# Altium PCB control plate.pcbdoc
Units mm, origin at the board's own origin, x right, y up, seen from the top; angles counter-clockwise.
Board outline 400 x 240 mm, 2 copper layers (Top Layer, Bottom Layer); 17 components, 0 nets, 0 pads, 0 vias.
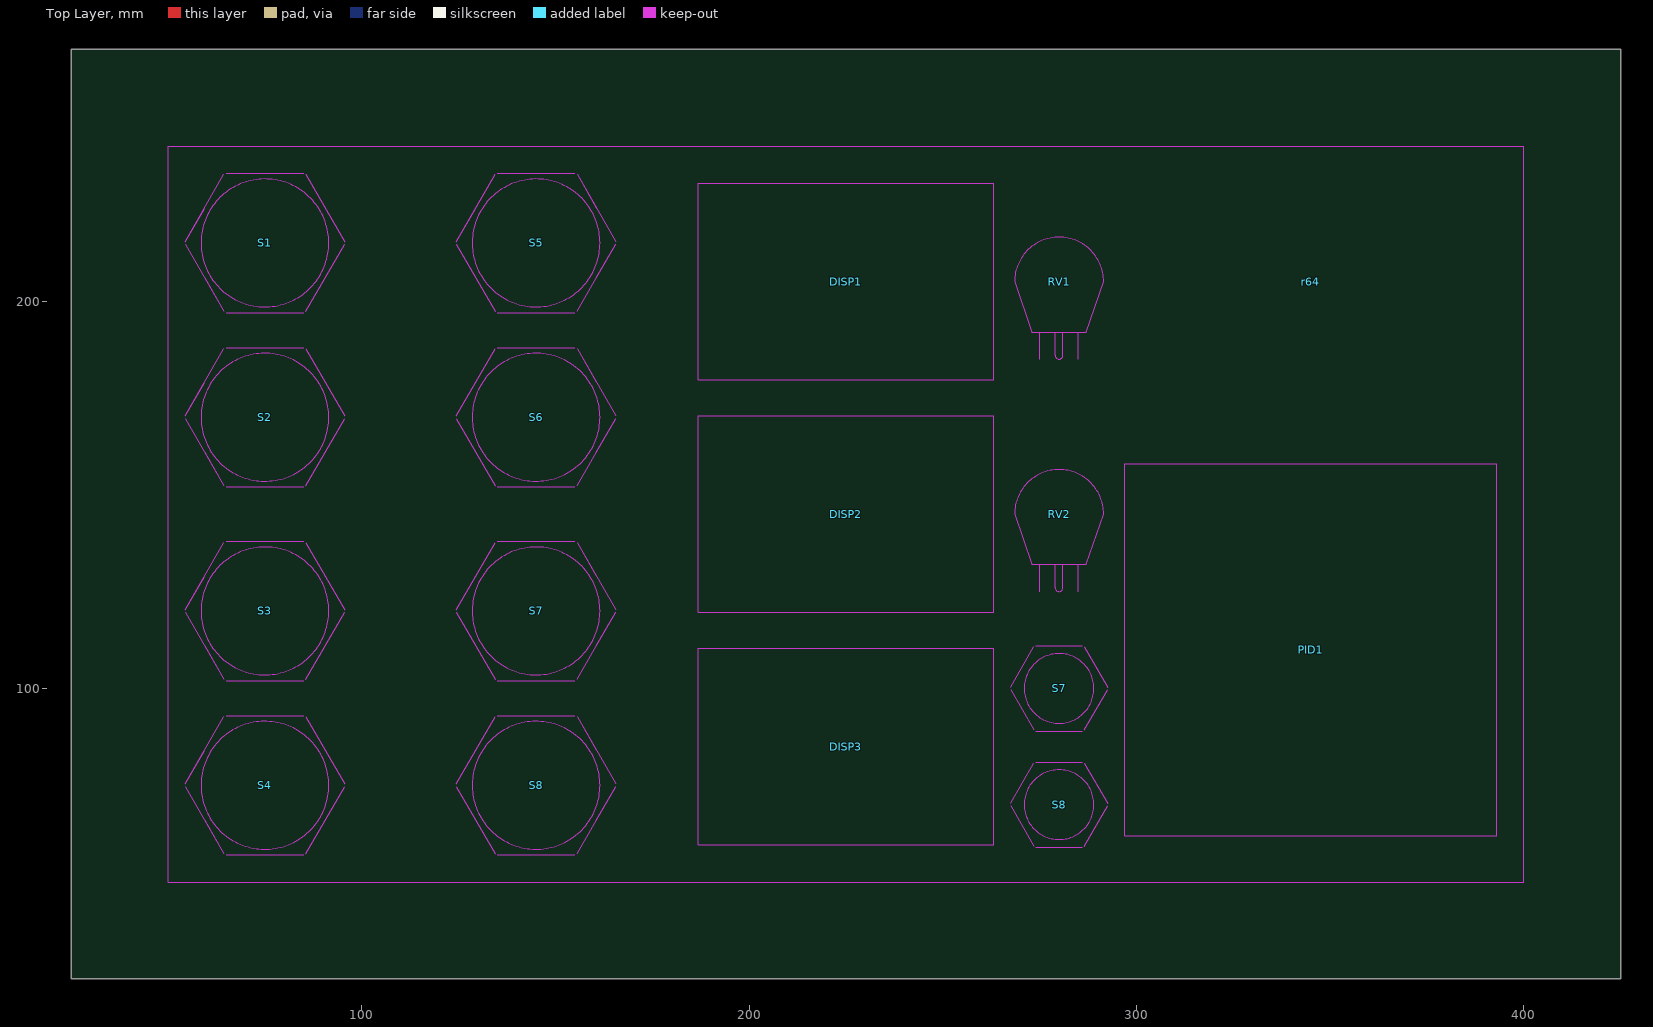
[diagram p0: Top Layer view]
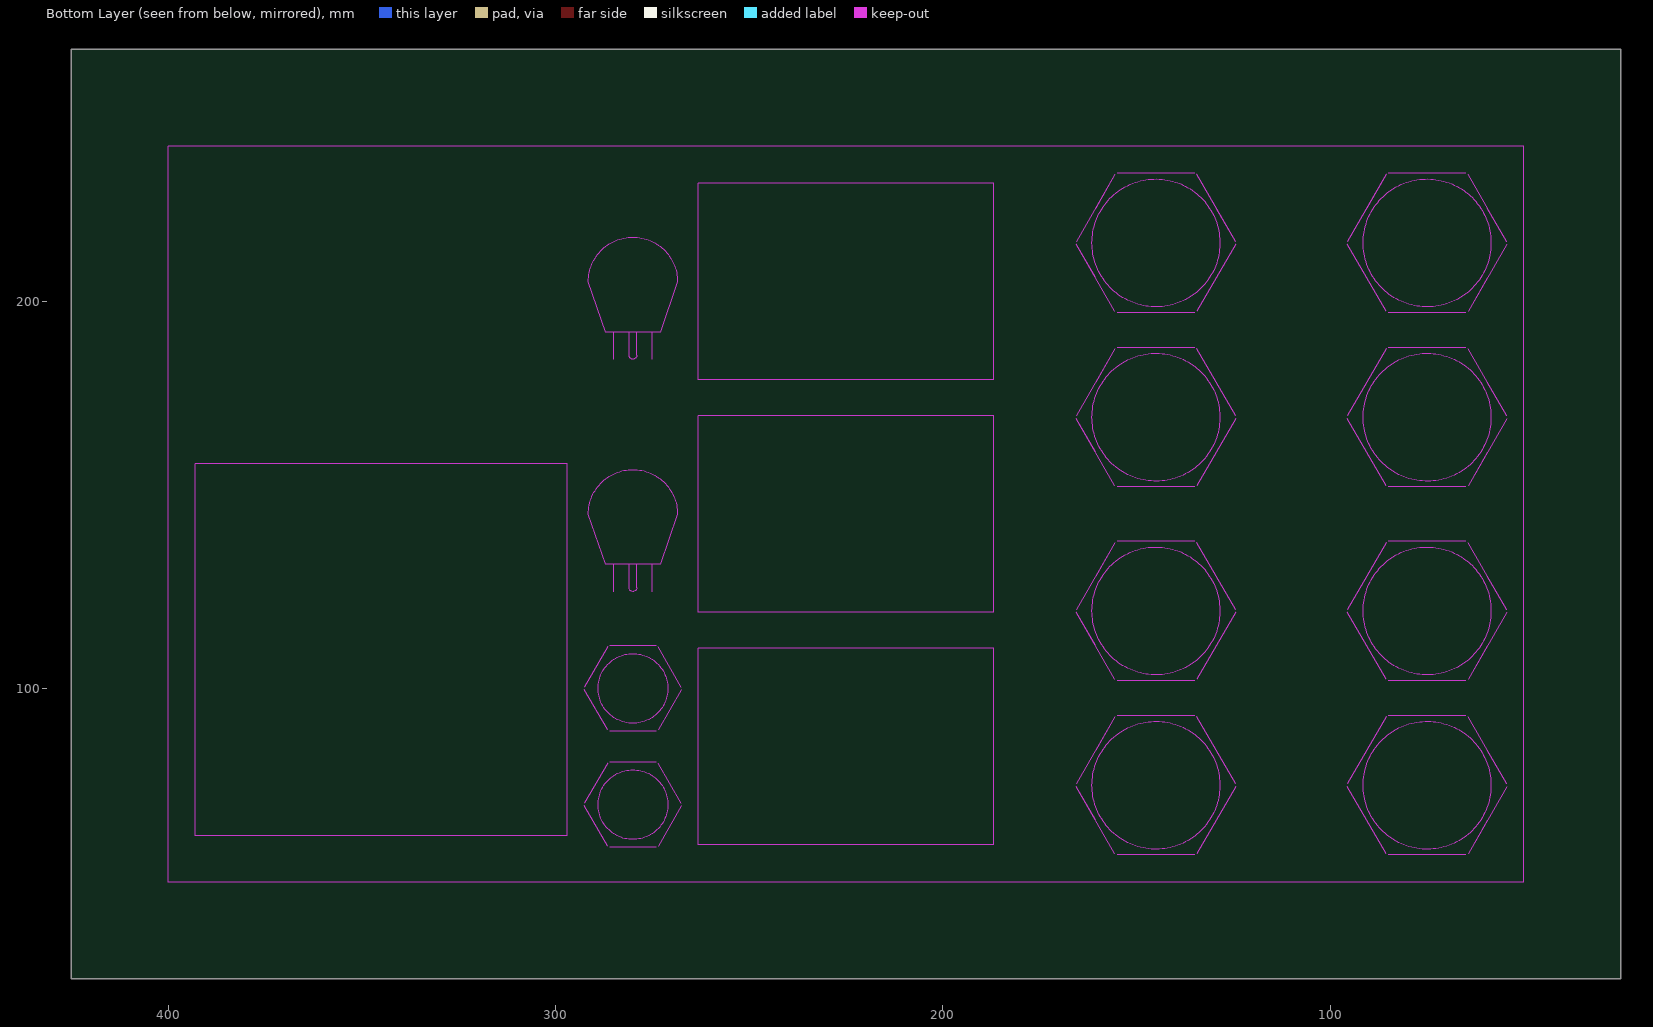
[diagram p1: Bottom Layer view, seen from below]

## Layer stack, top to bottom
Top Layer: signal copper 0.0356
Dielectric: dielectric 0.32, FR-4, Dk 4.8
Bottom Layer: signal copper 0.0356

## Board outline
25,25 25,265 425,265 425,25

## Design rules (kind name [scope] priority, off if disabled: settings)
Clearance [All] p1: gap=0.254
PolygonConnect [All] p1: connectstyle=Relief reliefconductorwidth=0.254 reliefentries=4 polygonreliefangle="90 Angle"
RoutingVias [All] p1: holewidth=0.711 width=1.27 viastyle="Through Hole" minholewidth=0.711 minwidth=1.27 maxholewidth=0.711 maxwidth=1.27
SilkscreenOverComponentPads [All] p1: minsilkscreentomaskgap=0.254
SolderMaskExpansion [All] p1: expansion=0.102
Width [All] p1: maxlimit=0.254 minlimit=0.254 preferedwidth=0.254
27 further rules are at their usual default settings.

## Components (designator, comment, footprint, x,y, rotation, side; value= is the part's Value field where it differs from the comment)
DISP1 "Comment" "DISPLAY MODULE" 225,205 r0 top
DISP2 "Comment" "DISPLAY MODULE" 225,145 r0 top
DISP3 "Comment" "DISPLAY MODULE" 225,85 r0 top
PID1 "Comment" "PID CONTROLLER" 345,110 r0 top
r64 "Comment" "HI TEMP" 345,205 r0 top
RV1 "Comment" POTENTIOMETER 280,205 r0 top
RV2 "Comment" POTENTIOMETER 280,145 r0 top
S1 "Comment" "33MM BUTTON" 75,215 r0 top
S2 "Comment" "33MM BUTTON" 75,170 r0 top
S3 "Comment" "33MM BUTTON" 75,120 r0 top
S4 "Comment" "33MM BUTTON" 75,75 r0 top
S5 "Comment" "33MM BUTTON" 145,215 r0 top
S6 "Comment" "33MM BUTTON" 145,170 r0 top
S7 "Comment" "33MM BUTTON" 145,120 r0 top
S7 "Comment" "18MM BUTTON" 280,100 r0 top
S8 "Comment" "33MM BUTTON" 145,75 r0 top
S8 "Comment" "18MM BUTTON" 280,70 r0 top

## Footprints (in the part's own frame and the unit in brackets; to place one, negate y for a bottom-side part, rotate by r counter-clockwise, add the part's x,y. Pads: shape width x height; smd on the part's side, far side on the other; paste and mask are expansions set on the pad)
"18MM BUTTON" [mm] "BUGLIN MP0045/1D2"
  Keep-Out Layer circle w0.254: c0,0 r9
  Keep-Out Layer lines w0.254: -12.526,-0.304 -6.526,-10.696 ; -12.526,0.304 -6.526,10.696 ; -6,-11 6,-11 ; -6,11 6,11 ; 6.526,-10.696 12.526,-0.304 ; 6.526,10.696 12.526,0.304
"33MM BUTTON" [mm]
  Keep-Out Layer circle w0.254: c0,0 r16.5
  Keep-Out Layer lines w0.254: -20.588,-0.34 -10.588,-17.66 -15.588,-9 ; -15.588,9 -20.588,0.34 -10.588,17.66 ; -10,-18 10,-18 0,-18 ; 0,18 -10,18 10,18 ; 10.588,-17.66 20.588,-0.34 15.588,-9 ; 15.588,9 10.588,17.66 20.588,0.34
"DISPLAY MODULE" [mm]
  Keep-Out Layer lines w0.254: -38.1,-25.375 -38.1,25.425 38.1,25.425 38.1,-25.375 -38.1,-25.375
"HI TEMP" [mm]
"PID CONTROLLER" [mm] "SHIMADEN SR23 SERIES CONTROLLER"
  Keep-Out Layer lines w0.254: -48,-48 -48,48 48,48 48,-48 -48,-48
POTENTIOMETER [mm] "TYCO TW1103KA (Farnell 1502913)"
  Keep-Out Layer lines w0.254: -5,-20 -5,-13 0,-13 5,-13 5,-20 ; -1,-13 -1,-18 -1,-19 ccw(c0,-19) 1,-19 1,-13 ; -11.5,0 cw(c0,0) 11.5,0 7,-13 -7,-13 -11.5,0

## Nets (pads, with @x,y where several pads share a name; then routed paths per layer and width w, separated by ;. In a path a pad name is that pad's centre, name@x,y a point inside that pad or via, vN(x,y) a via of type N, cw(c..) or ccw(c..) an arc to the next point about the centre after c; other vN are vias at no path point)

## Keep-outs
Keep-Out Layer:
  lines w0.254: 50,50 50,240 400,240 400,50 50,50

## Silkscreen, mask and mechanical layers (free items; w line width, h text height)
Mechanical 1:
  circle w0.254: c225,35 r2.25
  circle w0.254: c225,255 r2.25
  circle w0.254: c35,255 r2.25
  circle w0.254: c415,255 r2.25
  circle w0.254: c415,35 r2.25
  circle w0.254: c35,35 r2.25
  lines w0.127: 205.384,215.392 205.511,215.392
  lines w0.254: 25,25 425,25 425,265 25,265 25,25
Mechanical 3:
  lines w0.254: 35,40 cw(c35,35) 40,35 220,35 cw(c225,35) 230,35 410,35 cw(c415,35) 415,40 415,250 cw(c415,255) 410,255 230,255 cw(c225,255) 220,255 40,255 cw(c35,255) 35,250 35,120 35,40
  text "START" at 95,212.5 h10
  text "START" at 165,212.5 h10
  text "COOLING AGITATOR" at 50,190 h10
  text "DRUM" at 137.5,190 h10
  text "DRUM SPEED RPM" at 203,190 h10
  text "HIGH TEMP CUT OUT" at 320,170 h10
  text "STOP" at 95,167.5 h10
  text "STOP" at 165,167.5 h10
  text "ROAST FAN SPEED RPM" at 196,130 h10
  text "START" at 165,117.5 h10
  text "START" at 95.25,117.101 h10
  text "COOLING FAN" at 57.5,95 h10
  text "ROAST FAN" at 130,95 h10
  text "START / PAUSE" at 270.51,83.82 h5
  text "STOP" at 95,72.5 h10
  text "STOP" at 165,72.5 h10
  text "ELAPSED TIME" at 208,70 h10
  text "MM:SS" at 215,60 h10
  text "STOP / RESET" at 271.78,54.61 h5
  text "BARUN AWESOME COFFEE ROASTER" at 235,30 h18

## Text inside footprints (layer, text, board x,y; h text height)
DISP1: Mechanical 1 "CUT OUT" at 209,210 h5
DISP2: Mechanical 1 "CUT OUT" at 209,150 h5
DISP3: Mechanical 1 "CUT OUT" at 209,90 h5
PID1: Mechanical 1 "CUT OUT" at 329,111 h5
r64: Mechanical 1 "CUT OUT" at 327.5,202.5 h5
RV1: Mechanical 1 "CUT" at 277.25,206 h2; Mechanical 1 "OUT" at 277.25,202 h2
RV2: Mechanical 1 "CUT" at 277.25,146 h2; Mechanical 1 "OUT" at 277.25,142 h2
S1: Mechanical 1 "CUT OUT" at 65.25,213.75 h3
S2: Mechanical 1 "CUT OUT" at 65.25,168.75 h3
S3: Mechanical 1 "CUT OUT" at 65.25,118.75 h3
S4: Mechanical 1 "CUT OUT" at 65.25,73.75 h3
S5: Mechanical 1 "CUT OUT" at 135.25,213.75 h3
S6: Mechanical 1 "CUT OUT" at 135.25,168.75 h3
S7: Mechanical 1 "CUT OUT" at 135.25,118.75 h3
S7: Mechanical 1 "CUT OUT" at 273.5,99 h2
S8: Mechanical 1 "CUT OUT" at 135.25,73.75 h3
S8: Mechanical 1 "CUT OUT" at 273.5,69 h2